# Altium PCB Copy of djb_v2_rigid_right_1.PcbDoc
Units mm, origin at the board's own origin, x right, y up, seen from the top; angles counter-clockwise.
Board outline 29 x 14.8 mm, 4 copper layers (Top Layer, Inner 1, Inner 2, Bottom Layer), stack 0.59 mm thick; 70 components, 44 nets, 286 pads, 92 vias.
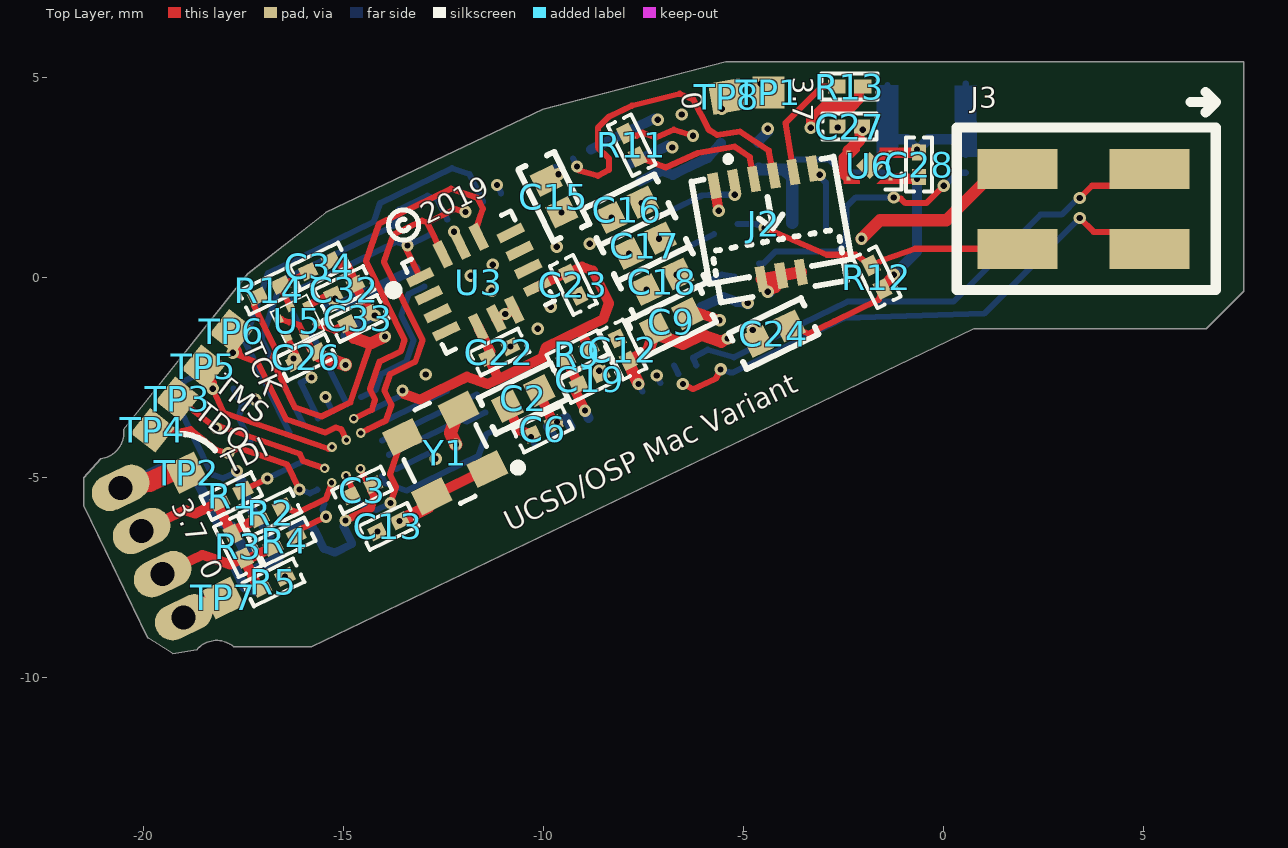
[diagram p0: Top Layer view]
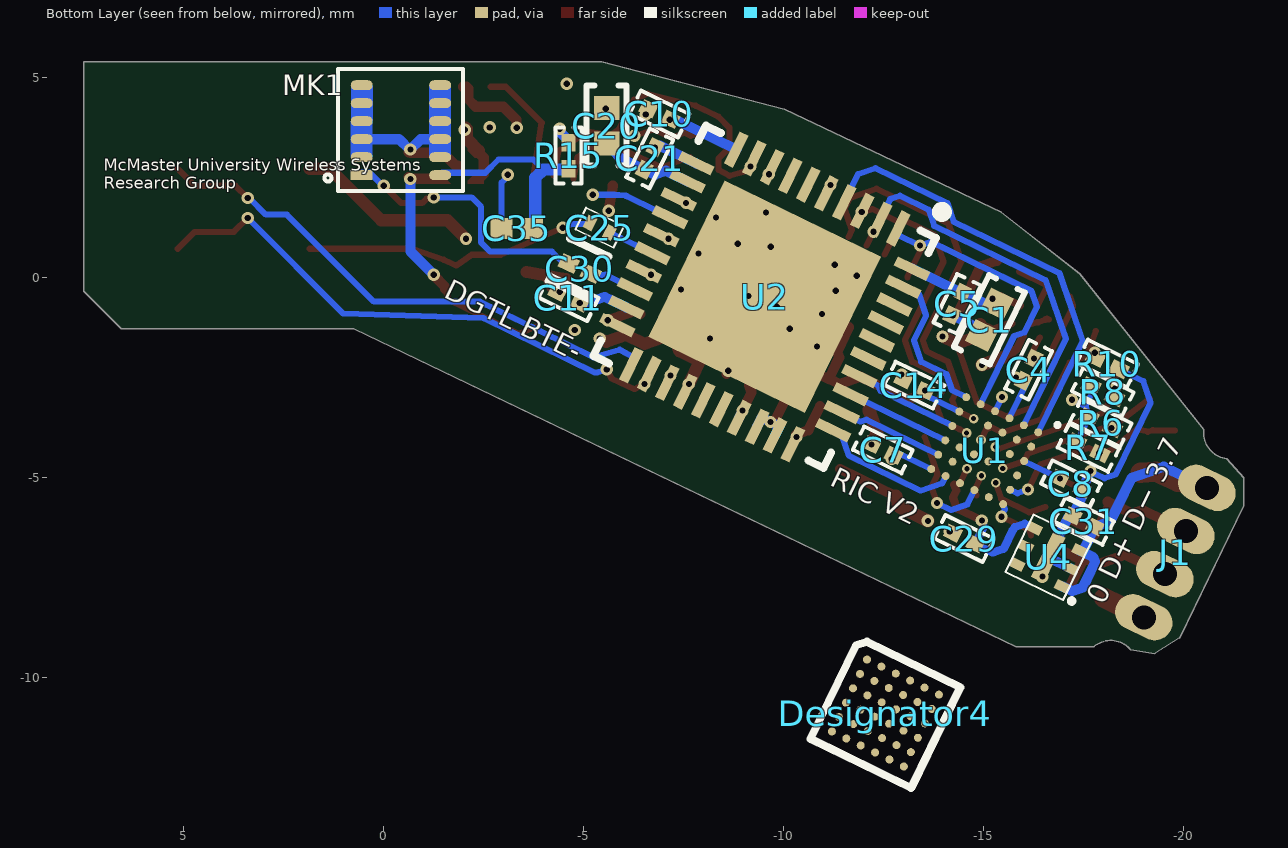
[diagram p1: Bottom Layer view, seen from below]
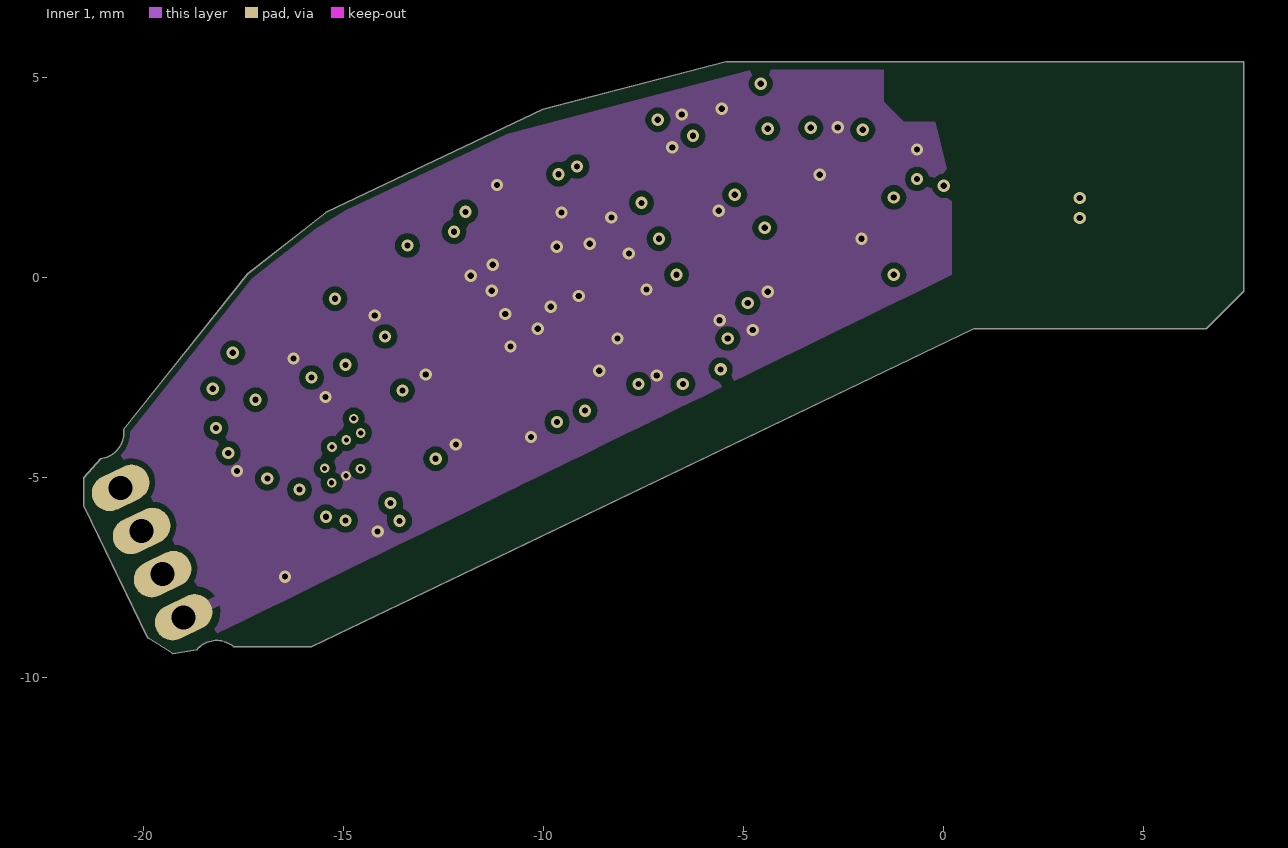
[diagram p2: Inner 1]
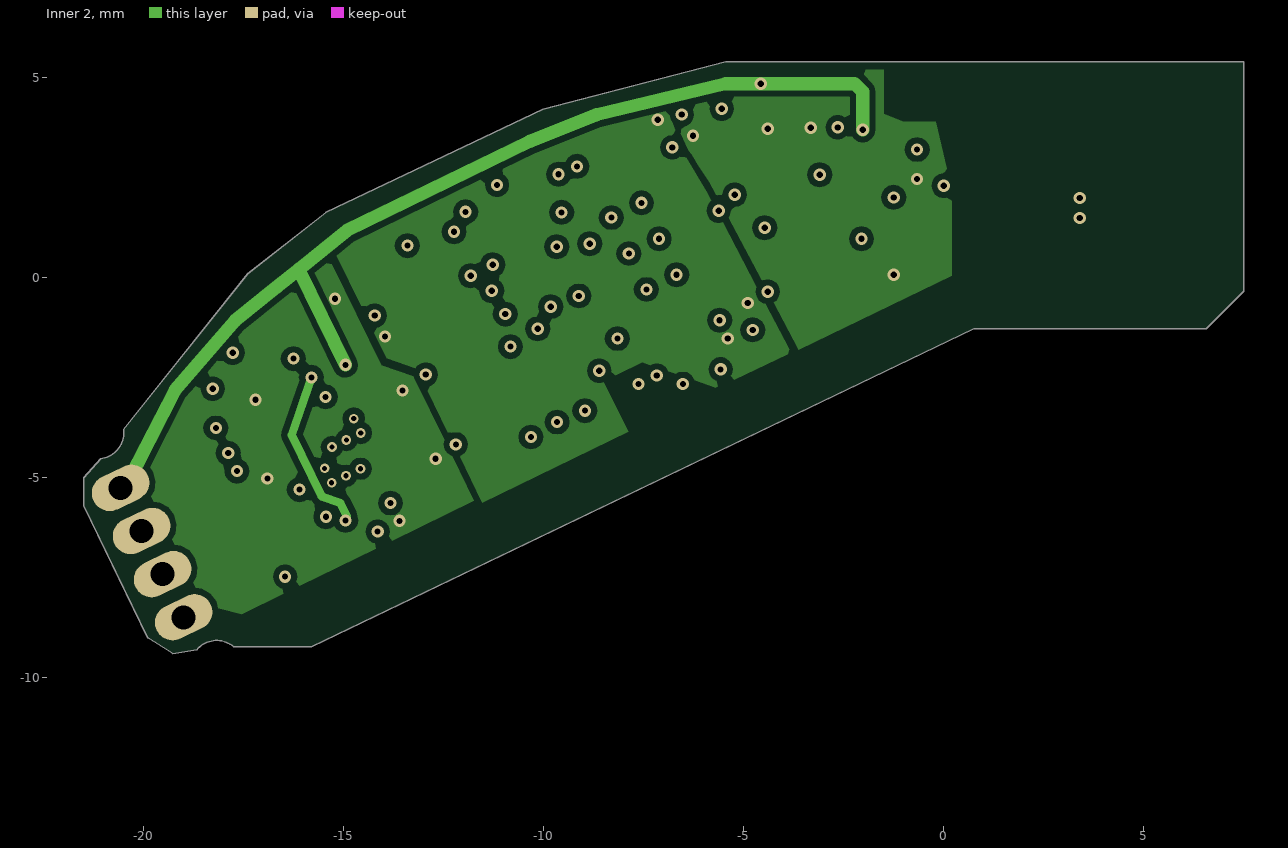
[diagram p3: Inner 2]

## Layer stack, top to bottom
Top Solder: solder mask 0.0102, Solder Resist, Dk 3.5
Top Layer: signal copper 0.0356
Dielectric 1: prepreg 0.0711, PP-006, Dk 4.1
Inner 1: signal copper 0.036
Dielectric 3: core 0.3048, Core-029, Dk 4.7
Inner 2: signal copper 0.036
Dielectric 2: prepreg 0.0711, PP-006, Dk 4.1
Bottom Layer: signal copper 0.0356
Bottom Solder: solder mask 0.0102, Solder Resist, Dk 3.5

## Board outline
-19.273,-9.396 -18.677,-9.304 cw(c-18.174,-9.723) -17.755,-9.221 -17.765,-9.225 -15.808,-9.225 0.75,-1.275 6.564,-1.275 7.5,-0.339 7.5,5.4 -5.447,5.4 -10.016,4.208 -15.444,1.633 -17.4,0.1 -20.503,-3.797 cw(c-21.153,-3.875) -21.075,-4.525 -21.5,-5 -21.5,-5.7 -19.898,-9.005 -19.885,-9.009

## Design rules (kind name [scope] priority, off if disabled: settings)
BoardOutlineClearance BoardOutlineClearance_Silk [OnLayer('Top Overlay') Or OnLayer('Bottom Overlay')] p1: gap=0 ignorepadtopadclearanceinfootprint=FALSE
BoardOutlineClearance BoardOutlineClearance_Normal [All] p2: gap=0.152 ignorepadtopadclearanceinfootprint=FALSE
Clearance [All] p1: gap=0.152 ignorepadtopadclearanceinfootprint=FALSE
ComponentClearance [All] p1: gap=0 collisioncheckmode=3 verticalgap=0 showdistances=FALSE
DiffPairsRouting [All] p1: maxlimit=0.254 minlimit=0.152 mostfreqgap=0.254 toplayer_minwidth=0.152 toplayer_maxwidth=0.381 toplayer_prefwidth=0.254 midlayer1_minwidth=0.152 midlayer1_maxwidth=0.381 midlayer1_prefwidth=0.254 midlayer2_minwidth=0.152 midlayer2_maxwidth=0.381 midlayer2_prefwidth=0.254 bottomlayer_minwidth=0.152 bottomlayer_maxwidth=0.381 bottomlayer_prefwidth=0.254 maxuncoupledlength=12.7
MinimumSolderMaskSliver [All] p1: minsoldermaskwidth=0.076
PasteMaskExpansion [All] p1 off: expansion=0
PlaneClearance [All] p1: clearance=0.254
PlaneConnect PlaneConnect_Via [IsVia] p1: planeconnectstyle=Direct reliefexpansion=0.254 reliefentries=4 reliefconductorwidth=0.254 reliefairgap=0.203
PlaneConnect PlaneConnect_Normal [All] p2: pad.planeconnectstyle=Relief pad.reliefexpansion=0.254 pad.reliefentries=4 pad.reliefconductorwidth=0.254 pad.reliefairgap=0.203 via.planeconnectstyle=Direct via.reliefexpansion=0.254 via.reliefentries=4 via.reliefconductorwidth=0.254 via.reliefairgap=0.203
PolygonConnect PolygonConnect_Normal [All] p1: thpad.connectstyle=Relief thpad.reliefconductorwidth=0.254 thpad.reliefentries=4 thpad.polygonreliefangle="90 Angle" thpad.airgapwidth=0.203 smdpad.connectstyle=Relief smdpad.reliefconductorwidth=0.254 smdpad.reliefentries=4 smdpad.polygonreliefangle="90 Angle" smdpad.airgapwidth=0.203 via.connectstyle=Direct via.reliefconductorwidth=0.254 via.reliefentries=4 via.polygonreliefangle="90 Angle" via.airgapwidth=0.254
RoutingVias [All] p1: holewidth=0.152 width=0.305 viastyle="Through Hole" minholewidth=0.127 minwidth=0.241 maxholewidth=1.27 maxwidth=2.54
SilkToSilkClearance [All] p1: silktosilkclearance=-25.4
SilkToSolderMaskClearance [IsPad] p1: minsilkscreentomaskgap=-25.4 clearancetoexposedcopper=TRUE
SolderMaskExpansion [All] p1 off: expansion=0.102 istentingtop=FALSE
Width [All] p1: maxlimit=2.54 minlimit=0.152 preferedwidth=0.152
22 further rules are at their usual default settings.

## Classes and differential pairs
differential pair LPRE: +LPRE_P -LPRE_N
differential pair LVDS: +LVDS_P -LVDS_N

## Components (designator, comment, footprint, x,y, rotation, side; value= is the part's Value field where it differs from the comment)
C1 "10uF" "CAP 0402/1005" -15.143,-1.049 r116 bottom
C2 "10uF" "CAP 0402/1005" -10.511,-3.018 r26 top
C3 "0.10uF" "CAP 0201/0603" -14.543,-5.313 r206 top
C4 "0.10uF" "CAP 0201/0603" -16.123,-2.301 r296 bottom
C5 "0.10uF" "CAP 0201/0603" -14.334,-0.655 r296 bottom
C6 "0.10uF" "CAP 0201/0603" -10.026,-3.783 r206 top
C7 "0.10uF" "CAP 0201/0603" -12.476,-4.305 r26 bottom
C8 "0.10uF" "CAP 0201/0603" -17.18,-5.153 r26 bottom
C9 "10uF" "CAP 0402/1005" -6.809,-1.096 r26 top
C10 "0.10uF" "CAP 0201/0603" -6.892,4.093 r206 bottom
C11 "0.10uF" "CAP 0201/0603" -4.619,-0.5 r206 bottom
C12 "0.10uF" "CAP 0201/0603" -8.023,-1.799 r296 top
C13 "0.10uF" "CAP 0201/0603" -13.881,-6.214 r26 top
C14 "0.10uF" "CAP 0201/0603" -13.265,-2.687 r26 bottom
C15 "10uF" "CAP 0402/1005" -9.745,2.028 r296 top
C16 "10uF" "CAP 0402/1005" -7.915,1.697 r206 top
C17 "10uF" "CAP 0402/1005" -7.477,0.798 r206 top
C18 "10uF" "CAP 0402/1005" -7.038,-0.101 r206 top
C19 "1uF" "CAP 0201/0603" -8.851,-2.543 r206 top
C20 "10uF" "CAP 0402/1005" -5.576,3.8 r90 bottom
C21 "0.10uF" "CAP 0201/0603" -6.65,2.981 r296 bottom
C22 "0.10uF" "CAP 0201/0603" -11.11,-1.858 r206 top
C23 "0.10uF" "CAP 0201/0603" -9.26,-0.177 r116 top
C24 "10uF" "CAP 0402/1005" -4.25,-1.4 r26 top
C25 "CL03A105KQ3CSNH" CL03A105KQ3CSNH -5.4,1.25 r206 bottom
C26 "1uF" "CAP 0201/0603" -15.941,-1.99 r26 top
C27 "1uF" "CAP 0201/0603" -2.35,3.78 r0 top
C28 "1uF" "CAP 0201/0603" -0.618,2.825 r270 top
C29 "1uF" "CAP 0201/0603" -14.51,-6.521 r206 bottom
C30 "GRM033R60J155ME14D" FP-GRM033-0_03-IPC_B -4.898,0.229 r25 bottom
C31 "1uF" "CAP 0201/0603" -17.502,-6.089 r206 bottom
C32 "1uF" "CAP 0201/0603" -14.985,-0.299 r206 top
C33 "1uF" "CAP 0201/0603" -14.635,-1.018 r206 top
C34 "1uF" "CAP 0201/0603" -15.606,0.288 r206 top
C35 "CL03A104KQ3NNNC" CAPC0603X33X15ML03T05 -3.325,1.231 r180 bottom
Designator4 "Comment" BGA36x6 -12.082,-9.546 r206 bottom
J1 "PIGTAIL" PIGTAIL -19.791,-6.871 r116 bottom
J2 "FFC" HIROSE_FH58M-7S-0.25SHW-99 -4.375,1.825 r190 top
J3 "M22-6550242R" M22-6550242R 3.5,1.724 r270 top
MK1 "VA1200AA" VA1200AA -1.41,2.563 r0 bottom
R1 "2k" "RES 0201/0603" -17.809,-5.46 r26 top
R2 "100" "RES 0201/0603" -16.829,-5.872 r26 top
R3 "115" "RES 0201/0603" -17.643,-6.713 r116 top
R4 "100" "RES 0201/0603" -16.479,-6.591 r26 top
R5 "2k" "RES 0201/0603" -16.757,-7.617 r206 top
R6 "4.7k" "RES 0201/0603" -17.925,-3.625 r26 bottom
R7 "4.7k" "RES 0201/0603" -17.618,-4.254 r26 bottom
R8 "4.7k" "RES 0201/0603" -17.975,-2.85 r26 bottom
R9 "1k" "RES 0201/0603" -9.158,-1.913 r206 top
R10 "2.2k" "RES 0201/0603" -18.089,-2.147 r26 bottom
R11 "1k" "RES 0201/0603" -7.8,3.314 r116 top
R12 "1k" "RES 0201/0603" -1.675,0.012 r296 top
R13 "1k" "RES 0201/0603" -2.35,4.775 r0 top
R14 "3k" "RES 0201/0603" -16.864,-0.326 r26 top
R15 "1k" "RES 0201/0603" -4.625,3.05 r270 bottom
TP1 "TP_SMD_DJB" TP_SMD_DJB#1 -4.375,4.625 r90 top
TP2 "TP_SMD_DJB" TP_SMD_DJB#1 -18.925,-4.875 r116 top
TP3 "TP_SMD_DJB" TP_SMD_DJB#2 -19.15,-3.025 r116 top
TP4 "TP_SMD_DJB" TP_SMD_DJB#2 -19.775,-3.816 r116 top
TP5 "TP_SMD_DJB" TP_SMD_DJB#2 -18.5,-2.225 r116 top
TP6 "TP_SMD_DJB" TP_SMD_DJB#2 -17.8,-1.336 r116 top
TP7 "TP_SMD_DJB" TP_SMD_DJB#1 -18.013,-8.007 r116 top
TP8 "TP_SMD_DJB" TP_SMD_DJB#3 -5.425,4.525 r90 top
U1 "LCMXO3LF-1300E-XUWG36" BGA36_WLCS_25X25_MACHXO3 -15.025,-4.324 r296 bottom
U2 "ADAU1372" QFN40_LFCSP_WQ_6mmx6mm -9.524,-0.479 r296 bottom
U3 "BMI160" LGA14R50P5X4_300X250X83 -11.629,-0.109 r26 top
U4 "MIC5367 LDO 1.2V" "LDO 1.2V" -16.617,-6.992 r116 bottom
U5 "MIC5380/1-xxYFT" "06L FCSTSLP" -16.156,-1.093 r206 top
U6 "MIC5504-1.8YMT" MICREL_DFN4 -1.85,2.8 r90 top
Y1 "12.288 MHz" OSC_2.5X2.0MM -11.407,-4.785 r116 top

## Footprints (in the part's own frame and the unit in brackets; to place one, negate y for a bottom-side part, rotate by r counter-clockwise, add the part's x,y. Pads: shape width x height; smd on the part's side, far side on the other; paste and mask are expansions set on the pad)
"06L FCSTSLP" [mm] "6-Pin 1mm x 1mm Thin MLF®   (FT)"
  oct 0.2x0.2 smd mask+0.01: 1(-0.4,0.25)
  rect 0.2x0.2 smd mask+0.01: 2(-0.4,-0.25) 3(0,-0.4) 4(0.4,-0.25) 5(0.4,0.25) 6(0,0.4)
  silkscreen extent -0.65,-0.5 0.5,0.5, body extent -0.5,-0.5 0.5,0.5, height 0.5
BGA36_WLCS_25X25_MACHXO3 [mm] "Lattice MachXO3 WLCSP36"
  round 0.2 smd: A1(-1,1) A2(-0.6,1) A3(-0.2,1) A4(0.2,1) A5(0.6,1) A6(1,1) B1(-1,0.6) B2(-0.6,0.6) B3(-0.2,0.6) B4(0.2,0.6) B5(0.6,0.6) B6(1,0.6) C1(-1,0.2) C2(-0.6,0.2) C3(-0.2,0.2) C4(0.2,0.2) C5(0.6,0.2) C6(1,0.2) D1(-1,-0.2) D2(-0.6,-0.2) D3(-0.2,-0.2) D4(0.2,-0.2) D5(0.6,-0.2) D6(1,-0.2) E1(-1,-0.6) E2(-0.6,-0.6) E3(-0.2,-0.6) E4(0.2,-0.6) E5(0.6,-0.6) E6(1,-0.6) F1(-1,-1) F2(-0.6,-1) F3(-0.2,-1) F4(0.2,-1) F5(0.6,-1) F6(1,-1)
  silkscreen extent -1.42,1.3 -1.33,1.4, body extent -1.27,-1.24 1.27,1.24, height 0.58
BGA36x6 [mm]
  round 0.2 smd mask+0.05: A1(0,0) A2(0.4,0) A3(0.8,0) A4(1.2,0) A5(1.6,0) A6(2,0) B1(0,-0.4) B2(0.4,-0.4) B3(0.8,-0.4) B4(1.2,-0.4) B5(1.6,-0.4) B6(2,-0.4) C1(0,-0.8) C2(0.4,-0.8) C3(0.8,-0.8) C4(1.2,-0.8) C5(1.6,-0.8) C6(2,-0.8) D1(0,-1.2) D2(0.4,-1.2) D3(0.8,-1.2) D4(1.2,-1.2) D5(1.6,-1.2) D6(2,-1.2) E1(0,-1.6) E2(0.4,-1.6) E3(0.8,-1.6) E4(1.2,-1.6) E5(1.6,-1.6) E6(2,-1.6) F1(0,-2) F2(0.4,-2) F3(0.8,-2) F4(1.2,-2) F5(1.6,-2) F6(2,-2)
  silkscreen extent -0.4,-2.4 2.4,0.4, body extent -0.25,-2.25 2.25,0.24, height 0.78
"CAP 0201/0603" [mm] "Chip Capacitor, 2-Leads, Body 0.60x0.30mm, IPC Medium Density"
  rect 0.4x0.35 smd: 1(-0.31,0) 2(0.31,0)
  silkscreen extent -0.68,-0.33 0.68,0.33, body extent -0.3,-0.15 0.3,0.15, height 0.3
"CAP 0402/1005" [mm] "Chip Capacitor, 2-Leads, Body 1.02x0.51mm, IPC Medium Density"
  rect 0.6x0.64 smd: 1(-0.44,0) 2(0.44,0)
  silkscreen extent -1,-0.5 1,0.5, body extent -0.5,-0.26 0.5,0.26, height 0.52
CAPC0603X33X15ML03T05 [mm] "Chip Capacitor, 2-Leads, Body 0.60x0.30mm, IPC Low Density"
  rect 0.56x0.52 smd: 1(-0.38,0) 2(0.38,0)
  body extent -0.32,-0.17 0.32,0.17, height 0.33
CL03A105KQ3CSNH [mm]
  rect 0.25x0.35 smd mask+0.05: 1(-0.275,0) 2(0.275,0)
  silkscreen extent -0.53,-0.3 0.52,0.3, body extent -0.3,-0.15 0.3,0.15, height 0.3
FP-GRM033-0_03-IPC_B [mm]
  rect 0.454x0.363 smd paste+0 mask+0: 1(-0.304,0) 2(0.304,0)
  silkscreen extent -0.53,-0.58 0.53,0.58, body extent -0.3,-0.15 0.3,0.15, height 0.33
HIROSE_FH58M-7S-0.25SHW-99 [mm] "Hirose FH58M-7S-0.25SHW(99) Top+Bottom Contacts 7-pin FFC Connector"
  rect 0.25x0.65 smd: 1(0.75,-0.7) 2(0.5,1.8) 3(0.25,-0.7) 4(0,1.8) 5(-0.25,-0.7) 6(-0.5,1.8) 7(-0.75,-0.7)
  rect 0.27x0.65 smd: S(-1.25,-0.7) S(1.25,-0.7)
  silkscreen extent -1.8,-1.32 1.8,2.2, body extent -1.75,-0.91 1.75,2.19, height 0.9
"LDO 1.2V" [mm] "6-Pin 1.6mmx1.6mm Thin MLF (MT)"
  rect 0.25x0.35 smd mask+0.01: 1(-0.5,-0.625) 2(0,-0.625) 3(0.5,-0.625) 4(0.5,0.625) 5(0,0.625) 6(-0.5,0.625)
  rect 1.26x0.35 smd mask+0.01: 7(0,0)
  silkscreen extent -0.8,-1.06 0.8,0.8, body extent -0.8,-0.8 0.8,0.8, height 0.8
LGA14R50P5X4_300X250X83 [mm]
  rect 0.675x0.25 smd: 1(-1.262,0.75) 2(-1.263,0.25) 3(-1.263,-0.25) 4(-1.262,-0.75) 8(1.262,-0.75) 9(1.262,-0.25) 10(1.263,0.25) 11(1.262,0.75)
  rect 0.25x0.675 smd: 5(-0.5,-1.013) 6(0,-1.013) 7(0.5,-1.013) 12(0.5,1.013) 13(0,1.013) 14(-0.5,1.012)
  silkscreen extent -2.1,-1.25 1.5,1.25, body extent -1.52,-1.27 1.52,1.27, height 0.83
M22-6550242R [mm] "4 Position Receptacle Connector 0.079\" (2.00mm) Surface Mount, Right Angle Gold"
  rect 1x2 smd: 1(-1,1.65) 2(1,1.65) 3(1,-1.65) 4(-1,-1.65)
  silkscreen extent -2.92,-3.18 2.03,3.3, body extent -2.15,-2.29 2.15,10.16, height 4.01
MICREL_DFN4 [mm] "Micrel DFN-4 from MIC5504-1.8YMT datasheet"
  rect 0.1x0.1 smd: 1(-0.325,-0.525) 2(0.325,-0.525) 3(0.325,0.525) 4(-0.325,0.525)
  rect 0.48x0.48 smd rot 45: EP(0,0)
  Top Layer region: -0.45,-0.18 -0.45,-0.65 -0.2,-0.65 -0.2,-0.43
  Top Layer region: 0.45,-0.65 0.2,-0.65 0.2,-0.43 0.38,-0.25 0.45,-0.25
  Top Layer region: -0.45,0.65 -0.2,0.65 -0.2,0.43 -0.38,0.25 -0.45,0.25
  Top Layer region: 0.45,0.65 0.2,0.65 0.2,0.43 0.38,0.25 0.45,0.25
  silkscreen extent -0.6,-0.8 -0.2,-0.4, body extent -0.5,-0.5 0.5,0.5, height 0.57
OSC_2.5X2.0MM [mm] "SMD MEMS oscillator, 2.5x2.0 mm"
  rect 0.65x0.85 smd: 1(0,0) 2(1.65,0) 3(1.65,1.55) 4(0,1.55)
  silkscreen extent -0.48,-0.8 2.13,1.77, body extent -0.48,-0.25 2.13,1.8, height 0.86
PIGTAIL [mm] "PIGTAIL"
  oval 0.9x1.5 hole 0.6: 1(1.8,0) 2(0.6,0) 3(-0.6,0) 4(-1.8,0)
QFN40_LFCSP_WQ_6mmx6mm [mm] "QFN, 40-Leads, Body 6.00x6.00mm, Pitch 0.50mm, Thermal Pad 4.35x4.35mm, IPC Medium Density"
  rect 0.9x0.25 smd: 1(-3,2.25) 2(-3,1.75) 3(-3,1.25) 4(-3,0.75) 5(-3,0.25) 6(-3,-0.25) 7(-3,-0.75) 8(-3,-1.25) 9(-3,-1.75) 10(-3,-2.25) 21(3,-2.25) 22(3,-1.75) 23(3,-1.25) 24(3,-0.75) 25(3,-0.25) 26(3,0.25) 27(3,0.75) 28(3,1.25) 29(3,1.75) 30(3,2.25)
  rect 0.25x0.9 smd: 11(-2.25,-3) 12(-1.75,-3) 13(-1.25,-3) 14(-0.75,-3) 15(-0.25,-3) 16(0.25,-3) 17(0.75,-3) 18(1.25,-3) 19(1.75,-3) 20(2.25,-3) 31(2.25,3) 32(1.75,3) 33(1.25,3) 34(0.75,3) 35(0.25,3) 36(-0.25,3) 37(-0.75,3) 38(-1.25,3) 39(-1.75,3) 40(-2.25,3)
  rect 4.35x4.35 smd: 41(0,0)
  silkscreen extent -3.97,-3.2 3.2,3.2, body extent -3.07,-3.07 3.07,3.07, height 0.8
"RES 0201/0603" [mm] "Chip Resistor, 2-Leads, Body 0.60x0.30mm, IPC Medium Density"
  rect 0.44x0.35 smd: 1(-0.325,0) 2(0.325,0)
  silkscreen extent -0.7,-0.33 0.7,0.33, body extent -0.3,-0.15 0.3,0.15, height 0.21
TP_SMD_DJB#1 [mm] "DJB style SMD test point"
  rect 0.8x0.8 smd paste-1000: 1(0,0)
TP_SMD_DJB#2 [mm] "DJB style SMD test point"
  rect 0.8x0.8 smd rot 116 paste-1000: 1(0,0)
TP_SMD_DJB#3 [mm] "DJB style SMD test point"
  rect 0.8x0.8 smd rot 100 paste-1000: 1(0,0)
VA1200AA [mm]
  rect 0.55x0.25 smd mask+0.07: 1(1.96,0)
  oval 0.55x0.25 smd mask+0.07: 2(1.96,-0.45) 3(1.96,-0.9) 4(1.96,-1.35) 5(1.96,-1.8) 6(1.96,-2.25) 7(0,-2.25) 8(0,-1.8) 9(0,-1.35) 10(0,-0.9) 11(0,-0.45) 12(0,0)
  silkscreen extent -0.58,-2.65 2.89,0.4, body extent 0.1,-2.5 1.95,0.25, height 0.93

## Part data
C1 C2 C9 C15 C16 C17 C18 C20 C24: library part C1005X5R0J106M050BC, "CAP CER 10UF 6.3V X5R 0402", Device Package="0402 (1005 Metric)", Manufacturer="TDK Corporation", Supplier Part Number 1=445-8920-2-ND, TemperatureCoefficient=X5R, TemperatureRange="-55C ~ 85C", Tolerance=20%, Voltage=6.3V, ComponentLink1Description=Datasheet, ComponentLink1URL=https://product.tdk.com/info/en/catalog/datasheets/mlcc_commercial_general_en.pdf, ComponentLink2Description="Digi-Key Listing", ComponentLink2URL=https://www.digikey.com/product-detail/en/tdk-corporation/C1005X5R0J106M050BC/445-8920-2-ND/3507809, PartId=12380, Part Number=C1005X5R0J106M050BC, Price=0.119, Supplier 1=Digi-Key
C3 C4 C5 C6 C7 C8 C10 C11 C12 C13 C14 C21 C22 C23: library part CL03A104KP3NNNC, "CAP CER 0.1UF 10V X5R 0201", Device Package="0201 (0603 Metric)", Manufacturer="Samsung Electro-Mechanics America, Inc.", Supplier Part Number 1=1276-1115-2-ND, TemperatureCoefficient=X5R, TemperatureRange="-55C ~ 85C", Tolerance=10%, Voltage=10V, ComponentLink1Description=Datasheet, ComponentLink1URL=http://www.samsungsem.com/kr/support/product-search/mlcc/__icsFiles/afieldfile/2016/08/18/S_CL03A104KP3NNND.pdf, ComponentLink2Description="Digi-Key Listing", ComponentLink2URL=https://www.digikey.com/product-detail/en/samsung-electro-mechanics-america-inc/CL03A104KP3NNNC/1276-1115-2-ND/3886773, PartId=20562, Part Number=CL03A104KP3NNNC, Price=0.0031, Supplier 1=Digi-Key
C19 C26 C27 C28 C29 C31 C32 C33 C34: library part 02016D105MAT2A, "CAP CER 1UF 6.3V X5R 0201", Device Package="0201 (0603 Metric)", Manufacturer="AVX Corporation", Supplier Part Number 1=478-7862-2-ND, TemperatureCoefficient=X5R, TemperatureRange="-55C ~ 85C", Tolerance=20%, Voltage=6.3V, ComponentLink1Description=Datasheet, ComponentLink1URL=http://datasheets.avx.com/cx5r.pdf, ComponentLink2Description="Digi-Key Listing", ComponentLink2URL=https://www.digikey.com/product-detail/en/avx-corporation/02016D105MAT2A/478-7862-2-ND/3079664, PartId=20442, Part Number=02016D105MAT2A, Price=0.063, Supplier 1=Digi-Key
C25: "1 µF ±10% 6.3V Ceramic Capacitor X5R 0201 (0603 Metric)", Supplier Part Number 1=1276-6440-1-ND, Supplier 1=Digi-Key
C30: library part CMP-06035-017352-1, "Chip Multilayer Ceramic Capacitors for General Purpose, 0201, 1.5uF, X5R, 15%, 20%, 6.3V", Capacitance=1.5uF, Case Code (Imperial)=0201, Case Code (Metric)=0603, Dielectric=X5R, Max Operating Temperature=85°C, Min Operating Temperature=-55°C, Tolerance=20%, Voltage Rating=6.3V, Case/Package=0201, Length=0.024inch, Mount="Surface Mount", Packaging="Tape and Reel", Thickness=0.013inch, Voltage Rating (DC)=6.3V, Width=0.012inch
C35: library part CMP-2010-00674-1, Manufacturer=Samsung, Part Number=CL03A104KQ3NNNC
J2: library part HIROSE_FH58M-7S-0.25SHW-99, "Hirose FH58M-7S-0.25SHW(99) 7-pin Top+Bottom Contact FFC Connector"
J3: "4 Position Receptacle Connector 0.079\" (2.00mm) Surface Mount, Right Angle Gold", Supplier Part Number 1=952-3188-1-ND, Supplier 1=Digi-Key
MK1: "Bone Conductor Sensor Accelerometer"
R1 R5: library part RC0201FR-072KL, "RES SMD 2K OHM 1% 1/20W 0201", Device Package="0201 (0603 Metric)", Manufacturer=Yageo, PowerRating="0.05W, 1/20W", Supplier Part Number 1=YAG2280TR-ND, TemperatureCoefficient=200ppm/C, TemperatureRange="-55C ~ 125C", Tolerance=1%, ComponentLink1Description=Datasheet, ComponentLink1URL=http://www.yageo.com/documents/recent/PYu-RC_Group_51_RoHS_L_04.pdf, ComponentLink2Description="Digi-Key Listing", ComponentLink2URL=https://www.digikey.com/product-detail/en/yageo/RC0201FR-072KL/YAG2280TR-ND/3202400, PartId=19505, Part Number=RC0201FR-072KL, Price=0.0042, Supplier 1=Digi-Key
R2 R4: library part RC0603F101CS, "RES SMD 100 OHM 1% 1/20W 0201", Device Package="0201 (0603 Metric)", Manufacturer="Samsung Electro-Mechanics America, Inc.", PowerRating="0.05W, 1/20W", Supplier Part Number 1=1276-3601-2-ND, TemperatureCoefficient=250ppm/C, TemperatureRange="-55C ~ 125C", Tolerance=1%, ComponentLink1Description=Datasheet, ComponentLink1URL=//media.digikey.com/pdf/Data%20Sheets/Samsung%20PDFs/RC_Series_ds.pdf, ComponentLink2Description="Digi-Key Listing", ComponentLink2URL=https://www.digikey.com/product-detail/en/samsung-electro-mechanics-america-inc/RC0603F101CS/1276-3601-2-ND/3963908, PartId=19787, Part Number=RC0603F101CS, Price=0.0081, Supplier 1=Digi-Key
R3: library part RC0201FR-07115RL, "RES SMD 115 OHM 1% 1/20W 0201", Device Package="0201 (0603 Metric)", Manufacturer=Yageo, PowerRating="0.05W, 1/20W", Supplier Part Number 1=YAG2383TR-ND, TemperatureCoefficient=200ppm/C, TemperatureRange="-55C ~ 125C", Tolerance=1%, ComponentLink1Description=Datasheet, ComponentLink1URL=http://www.yageo.com/documents/recent/PYu-RC_Group_51_RoHS_L_04.pdf, ComponentLink2Description="Digi-Key Listing", ComponentLink2URL=https://www.digikey.com/product-detail/en/yageo/RC0201FR-07115RL/YAG2383TR-ND/5280243, PartId=20289, Part Number=RC0201FR-07115RL, Price=0.0042, Supplier 1=Digi-Key
R6 R7 R8: library part RC0201FR-074K7L, "RES SMD 4.7K OHM 1% 1/20W 0201", Device Package="0201 (0603 Metric)", Manufacturer=Yageo, PowerRating="0.05W, 1/20W", Supplier Part Number 1=311-4.70KMTR-ND, TemperatureCoefficient=200ppm/C, TemperatureRange="-55C ~ 125C", Tolerance=1%, ComponentLink1Description=Datasheet, ComponentLink1URL=http://www.yageo.com/documents/recent/PYu-RC_Group_51_RoHS_L_04.pdf, ComponentLink2Description="Digi-Key Listing", ComponentLink2URL=https://www.digikey.com/product-detail/en/yageo/RC0201FR-074K7L/311-4.70KMTR-ND/1948894, PartId=19526, Part Number=RC0201FR-074K7L, Price=0.0056, Supplier 1=Digi-Key
R9 R11 R12 R13 R15: library part RC0201JR-071KL, "RES SMD 1K OHM 5% 1/20W 0201", Device Package="0201 (0603 Metric)", Manufacturer=Yageo, PowerRating="0.05W, 1/20W", Supplier Part Number 1=311-1KNTR-ND, TemperatureCoefficient=200ppm/C, TemperatureRange="-55C ~ 125C", Tolerance=5%, ComponentLink1Description=Datasheet, ComponentLink1URL=http://www.yageo.com/documents/recent/PYu-RC_Group_51_RoHS_L_04.pdf, ComponentLink2Description="Digi-Key Listing", ComponentLink2URL=https://www.digikey.com/product-detail/en/yageo/RC0201JR-071KL/311-1KNTR-ND/1948922, PartId=19463, Part Number=RC0201JR-071KL, Price=0.0042, Supplier 1=Digi-Key
R10: library part RC0603F222CS, "RES SMD 2.2K OHM 1% 1/20W 0201", Device Package="0201 (0603 Metric)", Manufacturer="Samsung Electro-Mechanics America, Inc.", PowerRating="0.05W, 1/20W", Supplier Part Number 1=1276-3634-2-ND, TemperatureCoefficient=250ppm/C, TemperatureRange="-55C ~ 125C", Tolerance=1%, ComponentLink1Description=Datasheet, ComponentLink1URL=//media.digikey.com/pdf/Data%20Sheets/Samsung%20PDFs/RC_Series_ds.pdf, ComponentLink2Description="Digi-Key Listing", ComponentLink2URL=https://www.digikey.com/product-detail/en/samsung-electro-mechanics-america-inc/RC0603F222CS/1276-3634-2-ND/3963941, PartId=19542, Part Number=RC0603F222CS, Price=0.0019, Supplier 1=Digi-Key
R14: library part RC0201FR-073KL, "RES SMD 3K OHM 1% 1/20W 0201", Device Package="0201 (0603 Metric)", Manufacturer=Yageo, PowerRating="0.05W, 1/20W", Supplier Part Number 1=YAG2656TR-ND, TemperatureCoefficient=200ppm/C, TemperatureRange="-55C ~ 125C", Tolerance=1%, ComponentLink1Description=Datasheet, ComponentLink1URL=http://www.yageo.com/documents/recent/PYu-RC_Group_51_RoHS_L_04.pdf, ComponentLink2Description="Digi-Key Listing", ComponentLink2URL=https://www.digikey.com/product-detail/en/yageo/RC0201FR-073KL/YAG2656TR-ND/5280516, PartId=19520, Part Number=RC0201FR-073KL, Price=0.0042, Supplier 1=Digi-Key
TP1 TP2 TP3 TP4 TP5 TP6 TP7 TP8: "Digital Jellybean Style SMD Test Point", DNP=DNP
U1: "Lattice MachXO3 36-ball 2.5x2.5mm FPGA"
U2: library part ADAU1772BCPZ, "General Purpose Audio Codec 4ADC / 2DAC Ch 40-Pin LFCSP"
U3: library part BMI160_1, "BMI160 2.5 x 3 mm Tiaxial Accelerometer / Gyroscope Inertial Measurement Unit", Package="LGA-14 Bosch", Availability=Good, MF=Bosch, MP=BMI160, Price="3.29 USD"
U4: Supplier Part Number 1=576-3723-6-ND, Supplier 1=Digi-Key
U5: "LDO 2fixed Outputs", Supplier Part Number 1=576-3453-6-ND, Supplier 1=Digi-Key
U6: library part MICREL_MIC5504-1.8YMT, "Micrel MIC5504-1.8YMT 1.8V 300mA LDO"
Y1: library part MC_DSC1033DI2-012.2880, "Microchip 12.288 MHz SMD MEMS Oscillator", DIGIKEY_PN=DSC1033DI2-012.2880-ND

## Via types
v1: diameter 0.305, hole 0.152, Top Layer to Bottom Layer, tented both sides, 79 vias
v2: diameter 0.241, hole 0.127, Top Layer to Bottom Layer, tented both sides, 8 vias
v3: diameter 0.305, hole 0.152, Top Layer to Bottom Layer, 5 vias

## Nets (pads, with @x,y where several pads share a name; then routed paths per layer and width w, separated by ;. In a path a pad name is that pad's centre, name@x,y a point inside that pad or via, vN(x,y) a via of type N, cw(c..) or ccw(c..) an arc to the next point about the centre after c; other vN are vias at no path point)
+1V2_D: C3.1 C4.2 C29.2 U1.C1 U1.D5 U4.4 | length 9.9
  Top Layer w0.152: v2(-14.582,-4.776) -14.411,-5.126 C3.1
  Top Layer w0.203: v1(-14.953,-6.069) -14.324,-5.762 -14.232,-5.495 -14.315,-5.324 C3.1
  Inner 2 w0.203: v1(-15.808,-2.492) -16.302,-3.929 -15.551,-5.471 -15.083,-5.632 -14.918,-5.969 v1(-14.953,-6.069)
  Bottom Layer w0.152: C4.2@-16.077,-2.623 U1.C1 ; C4.2 v1(-15.808,-2.492)
  Bottom Layer w0.203: U4.4 -16.027,-6.148 -15.768,-6.237 -15.735,-6.304 -15.727,-6.307 -15.496,-6.779 -15.229,-6.871 C29.2 -15.003,-6.216 v1(-14.953,-6.069)
+1V8: C24.2 C28.2 R11.2 R12.2 R13.2 R15.1 U6.1 | length 10.9
  Top Layer w0.152: R11.2 -7.675,3.55 -7.525,3.625 -7.204,3.5 -6.75,3.7 v1(-6.271,3.55) ; C24.2 -3.375,-1.4 -2.733,-1.088 -1.625,-0.55 R12.2
  Top Layer w0.254: v1(-3.325,3.75) -3.315,3.76 -3.315,3.95 -2.99,4.275 -2.3,4.275 -2.118,4.457 -2.118,4.727 -2.07,4.775 R13.2 R13.2@-1.98,4.775 ; R12.2 -1.533,-0.222 -1.25,0.061 v3(-1.25,0.075) ; U6.1 C28.2@-0.658,2.475 ; v1(-0.665,2.467) C28.2@-0.658,2.475 ; C28.2 C28.2@-0.658,2.475
  Bottom Layer w0.254: R15.1 -4.65,3.4 -4.4,3.65 v1(-4.4,3.725) ; v3(-1.25,0.075) -0.665,0.659 v1(-0.665,2.467)
+3V3_A: C9.1 C10.2 C11.2 C12.2 C33.2 R14.1 U2.10 U2.19 U2.24 U5.1 | length 15.4
  Top Layer w0.152: R14.1 -17.237,-0.702 -16.7,-1.803 -16.792,-2.071 -16.222,-3.239 -15.553,-3.469 -14.834,-3.119 -14.328,-1.648
  Top Layer w0.203: U5.1 -15.219,-1.303 C33.2
  Top Layer w0.305: C33.2 -14.742,-1.505 -14.328,-1.648 v1(-13.968,-1.472) ; v1(-7.627,-2.657) -7.897,-2.105 C12.2 -7.393,-1.837 C9.1 ; C9.1@-7.134,-1.432 C9.1 ; v1(-5.4,-1.52) -5.561,-1.6 -6.063,-1.427 -6.523,-1.651 -7.129,-1.442 C9.1
  Bottom Layer w0.152: v1(-7.627,-2.657) U2.24
  Bottom Layer w0.254: U2.10 -7.23,3.978 C10.2 ; U2.19 -5.525,-0.479 -5.175,-0.6 v1(-4.9,-0.633)
  Bottom Layer w0.305: v1(-4.9,-0.633) C11.2
  other v1: -7.15,3.95
+3V3_D: C1.2 C5.1 C7.1 C8.2 C13.2 C14.1 C22.2 C23.2 C32.2 R1.2 R6.2 R7.2 R8.2 R9.1 U1.A3 U1.F2 U1.F6 U2.40 U3.5 U3.8 U5.2 Y1.1 Y1.4 | length 22.5
  Top Layer w0.152: R1.2 v1(-16.91,-5.021)
  Top Layer w0.203: U5.2 -15.421,-0.456 -15.287,-0.502 v1(-15.22,-0.525)
  Top Layer w0.254: v1(-13.534,-2.818) -13.49,-2.908 -13.089,-3.046 -11.921,-2.476 -11.399,-2.656 -11.13,-2.524 ; Y1.4 Y1.1 ; U3.5 -11.338,-1.847 C22.2 -11.13,-2.524 ; U3.8 -9.449,0.12 C23.2 -9.045,0.273 -8.764,0.176 -8.37,-0.633 -8.508,-1.034 -9.047,-1.297 ; R9.1 -9.068,-1.357 -9.047,-1.297 ; -11.13,-2.524 -11.116,-2.529 -10.038,-2.003 -9.946,-1.736 -9.047,-1.297
  Top Layer w0.33: v1(-13.602,-6.078) -12.892,-5.732 Y1.4
  Bottom Layer w0.152: R8.2@-17.76,-2.765 -17.541,-3.215 ; R7.2@-17.333,-4.131 R7.2 R6.2 -17.541,-3.215 ; v1(-17.204,-3.05) -17.541,-3.215 ; C8.2 U1.A3 ; U1.F2 -13.499,-2.913 -13.495,-2.899 v1(-13.534,-2.818) ; U1.F6 -12.798,-4.351 -12.785,-4.355 -12.745,-4.436 v1(-12.701,-4.526)
  Bottom Layer w0.254: v1(-15.22,-0.525) -15.364,-0.595 -15.422,-0.624 C1.2 -15.272,-0.676 -15.162,-0.714 -15.135,-0.701 C5.1 -14.456,-0.381 U2.40
+3V7: C26.2 C27.2 C31.2 J1.1 TP1.1 TP2.1 U4.1 U4.3 U5.4 U5.6 U6.3 U6.4 | length 37.8
  Top Layer w0.152: U5.4 -16.58,-1.022 -16.552,-1.032 -16.541,-1.052 -16.362,-1.114 -16.341,-1.104 -16.112,-1.183 U5.6
  Top Layer w0.203: U5.6 -15.81,-1.803 C26.2
  Top Layer w0.254: U6.4 -2.5,2.6 -2.5,3 U6.3 -2.375,3.175 ; -2.108,3.442 -2.108,3.732 -2.06,3.78 C27.2
  Top Layer w0.305: -2.375,3.175 -2.108,3.442
  Top Layer w0.33: C26.2 -15.614,-1.952 v1(-14.959,-2.178)
  Top Layer w0.508: J1.1 -19.85,-5.1 -19.3,-4.85 TP2.1
  Inner 2 w0.33: J1.1@-20.491,-5.299 -19.214,-2.807 -17.721,-1.077 -16.683,-0.241 -16.104,0.226 ; v1(-14.959,-2.178) -16.116,0.193 -16.104,0.226 ; v1(-2.025,3.7) -2.025,4.648 -2.227,4.85 -5.457,4.85 -8.684,4.075 -10.342,3.412 -14.926,1.176 -16.104,0.226
  Bottom Layer w0.254: J1.1@-20.668,-5.074 J1.1@-20.601,-5.097 ; J1.1 -19.501,-4.727 -18.692,-5.006 -18.162,-6.093 C31.2 -17.511,-6.777 U4.3 -17.735,-6.981 -17.781,-7.115 -17.474,-7.744 -17.206,-7.836 U4.1
  other v1: -4.575,4.85
BCLK: U1.F5 U2.32 | length 2.7
  Bottom Layer w0.152: U1.F5 -12.066,-3.548 -11.925,-3.597 U2.32
CCLK: U1.F1 U2.39 | length 3.8
  Bottom Layer w0.152: U1.F1 -14.205,-2.812 -14.067,-2.411 -13.438,-2.104 -13.254,-1.569 -13.56,-0.94 -13.379,-0.412 U2.39
CS_C: U1.A1 U2.4 | length 11
  Bottom Layer w0.152: U1.A1 -17.476,-1.581 -16.892,0.114 -14.25,1.402 -14.091,1.863 -12.296,2.738 -11.853,2.586 U2.4
CS_I: U1.E2 U3.12 | length 9.6
  Top Layer w0.152: v2(-14.749,-3.522) -14.299,-3.303 -14.214,-3.056 -14.346,-2.786 -14.109,-2.097 -13.569,-1.834 -13.477,-1.567 -14.442,0.411 -14.119,1.347 -12.322,2.224 -11.653,1.993 -11.522,1.724 -11.706,1.189 U3.12
DMIC: U1.F3 U2.34 | length 2.7
  Bottom Layer w0.152: U1.F3 -12.416,-2.829 -12.373,-2.702 U2.34
DSPK: U1.F4 U2.33 | length 2.6
  Bottom Layer w0.152: U1.F4 -14.032,-4.068 U2.33
GND: C1.1 C2.1 C3.2 C4.1 C5.2 C6.2 C7.2 C8.1 C9.2 C10.1 C11.1 C12.1 C13.1 C14.2 C15.2 C16.2 C17.2 C18.2 C19.1 C20.2 C21.1 C22.1 C23.1 C24.1 C26.1 C27.1 C28.1 C29.1 C31.1 C32.1 C33.1 C34.1 C35.1 J1.4 J2.2 J2.4 J2.6 J2.S J3.4 MK1.2 MK1.3 MK1.4 MK1.5 MK1.6 MK1.7 MK1.8 MK1.9 MK1.10 MK1.11 R5.1 R10.1 TP7.1 TP8.1 U1.C5 U1.D1 U2.5 U2.11 U2.20 U2.23 U2.30 U2.41 U3.6 U3.7 U4.2 U4.7 U5.5 U6.2 U6.EP Y1.2 | length 33.5
  Top Layer w0.152: U5.5 -16.167,-1.961 C26.1 ; v2(-14.942,-4.951) -14.771,-5.302 C3.2
  Top Layer w0.254: C34.1 -14.926,0.286 -14.707,-0.164 C33.1 ; U3.6 v1(-10.961,-0.909) U3.7 ; C2.1 -10.612,-3.813 C6.2 ; v1(-8.612,-2.326) C19.1 ; C9.2 -6.27,-0.833 v1(-5.601,-1.063) ; J2.S@-5.728,2.297 v1(-5.625,1.675) ; -4.309,0.009 -4.334,-0.091 v1(-4.4,-0.35) -4.398,-0.349 -4.2,-0.25 J2.4 ; C27.1 -2.66,3.77 v1(-2.65,3.76) ; U6.EP -1.8,2.8 -1.475,3.125 ; -1.425,3.125 U6.2 C28.1@-0.666,3.125 ; C28.1@-0.665,3.125 C28.1@-0.665,3.135 ; v1(-0.665,3.204) -0.665,3.183 C28.1
  Top Layer w0.305: J2.2 -4.309,0.009 J2.4 J2.6 ; v1(-2.055,0.973) -1.591,1.437 0.064,1.437 1.35,2.724 J3.4
  Top Layer w0.33: v1(-12.197,-4.169) -12.333,-3.89 Y1.2
  Top Layer w0.508: J1.4 TP7.1
  Bottom Layer w0.152: R10.1 -18.988,-2.586 -19.172,-3.12 -18.296,-4.918 -18.015,-5.015 v1@-17.673,-4.848 ; v1(-15.459,-2.978) U1.D1 ; v1(-11.167,2.319) U2.5 ; v1(-10.319,-3.982) U2.30 ; v1(-7.173,-2.447) U2.23 ; U2.20 -5.839,-1.179 v1(-5.601,-1.063) ; v1(-3.1,2.575) -3.1,2.534 -2.945,2.379 C35.1 ; MK1.11@-1.41,3.075 MK1.7 ; v1(-0.665,3.204) v1@-0.643,3.204 ; MK1.2@0.55,3.075 MK1.3 MK1.4 MK1.5@0.55,4.425 ; MK1.5 MK1.6@0.55,4.858
  Bottom Layer w0.254: v1@-17.673,-4.848 C8.1 -17.495,-5.396 C31.1 -17.103,-5.994 U4.7 U4.2 ; C1.1 -14.89,-1.271 v1(-14.225,-0.947) ; U2.41@-8.625,-2.321 v1(-8.612,-2.326) ; U2.11 C21.1@-6.906,3.301 ; v1(-4.4,-0.35) -4.354,-0.35 C11.1 ; MK1.10 -0.924,3.463 v1(-0.665,3.204) ; v1@-0.643,3.204 -0.385,3.463 MK1.3
  other v1: -16.465,-7.474 -14.15,-6.345 -17.669,-4.835 -12.949,-2.422 -16.259,-2.022 -10.831,-1.722 -8.159,-1.521 -4.775,-1.303 -10.15,-1.275 -9.825,-0.725 -9.124,-0.456 -11.3,-0.325 -7.434,-0.294 -11.825,0.05 -11.275,0.325 -7.872,0.605 -9.675,0.775 -8.85,0.85 -8.31,1.504 -9.552,1.633 -6.786,3.26 -6.55,4.08 -5.55,4.225
LPRE_N: R2.2 U1.B5 | length 1.6
  Top Layer w0.152: R2.2 -16.136,-5.867 -15.439,-5.528 v2(-15.301,-5.126)
LPRE_P: R4.2 U1.A6 | length 1.3
  Top Layer w0.152: R4.2 -16.14,-6.315 v1(-15.444,-5.975)
  Bottom Layer w0.152: U1.A6 -15.531,-5.795 v1(-15.444,-5.975)
LRCLK: U1.E6 U2.31 | length 3.6
  Bottom Layer w0.152: U1.E6 -13.96,-5.14 -13.425,-5.324 -11.627,-4.447 -11.445,-3.919 U2.31
LVDS_N: J1.2 R1.1 R2.1 R3.2 | length 3.9
  Top Layer w0.254: J1.2 -18.975,-5.806 -18.708,-5.898 R1.1 -18.136,-5.702 R3.2 -17.75,-6.321 R2.1
LVDS_P: J1.3 R3.1 R4.1 R5.2 | length 3.9
  Top Layer w0.254: J1.3 -18.539,-6.928 -17.837,-7.17 R3.1 ; R5.2 -17.149,-7.725 R3.1 ; R4.1 -17.4,-7.04 R3.1
MIC1: J2.5 U2.9 | length 8.1
  Top Layer w0.152: v1(-9.168,2.783) -9.12,2.684 -8.644,2.55 -8.372,2.696 -8.372,2.982 -8.644,3.254 -8.644,3.751 -8.37,4.025 -7.8,4.3 -6.6,4.6 -6.259,4.454 -5.875,3.7 -5.663,3.57 -5.095,3.659 -4.375,3.18 J2.5
  Bottom Layer w0.152: U2.9 v1(-9.168,2.783)
MIC2: J2.1 U2.14 | length 2.1
  Bottom Layer w0.152: U2.14 -6.823,1.679 -6.086,2.038 cw(c-6.019,1.901) -6.032,2.053 -5.764,2.075 v1(-5.225,2.075)
MIC3: C25.2 U2.16 | length 1.1
  Bottom Layer w0.152: U2.16 C25.2@-5.738,1.09
MIC4: C30.1 U2.18 | length 1.1
  Bottom Layer w0.152: U2.18 -5.55,0.075 C30.1@-5.229,0.026
MISO: U1.E1 U2.1 U3.1 | length 7.9
  Top Layer w0.152: v1(-13.409,0.803) -13.438,0.72 U3.1
  Bottom Layer w0.152: U1.E1 -15.757,-1.455 -16.024,-1.363 -16.331,-0.733 -16.193,-0.332 -13.677,0.895 v1(-13.409,0.803) U2.1@-12.87,1.066
MOSI: U1.E3 U2.3 U3.14 | length 9.1
  Top Layer w0.152: v2(-14.573,-3.881) -14.394,-3.794 -14.392,-3.789 -13.943,-3.57 -13.806,-3.173 -13.981,-2.814 -13.843,-2.413 -13.214,-2.106 -13.03,-1.571 -13.994,0.406 -13.764,1.075 -13.045,1.426 -12.911,1.38 ; U3.14 -12.911,1.38 ; v1(-11.952,1.647) -11.925,1.638 -11.943,1.629 -11.956,1.634 -12.21,1.722 -12.911,1.38
  Bottom Layer w0.152: U2.3 v1(-11.952,1.647)
NetC2_2: C2.2 C6.1 U2.28 U2.29 | length 1.9
  Top Layer w0.254: C2.2 -10.129,-2.865 C6.1
  Bottom Layer w0.254: U2.29 -9.891,-3.717 v1(-9.667,-3.608) -9.442,-3.498 U2.28
NetC15_1: C15.1 U2.8 | length 0.3
  Top Layer w0.152: C15.1@-9.651,2.519 v1(-9.628,2.586)
  Bottom Layer w0.152: U2.8 v1(-9.628,2.586)
NetC16_1: C16.1 U2.13 | length 0
  Top Layer w0.152: v1(-7.555,1.872) C16.1
NetC17_1: C17.1 U2.15 | length 0
  Top Layer w0.152: v1(-7.117,0.973) C17.1
NetC18_1: C18.1 U2.17 | length 0
  Top Layer w0.152: v1(-6.679,0.075) C18.1
NetC19_2: C19.2 R9.2 U2.27 | length 1.6
  Top Layer w0.254: R9.2 -9.43,-2.063 C19.2 -9.194,-2.866 v1(-8.971,-3.324)
  Bottom Layer w0.254: v1(-8.971,-3.324) U2.27
NetC20_1: C20.1 C21.2 U2.12 | length 2.4
  Bottom Layer w0.254: U2.12 -7.056,2.672 -6.775,2.576 C21.2 -5.9,3 C20.1
NetC25_1: C25.1 J3.3 R12.1 | length 7.3
  Top Layer w0.152: v1(-4.475,1.25) -2.925,0.575 -2.2,0.575 R12.1 -1.5,0.45 -0.714,0.724 J3.3
  Bottom Layer w0.152: C25.1@-5.151,1.348 -4.705,1.348 -4.705,1.342 v1(-4.475,1.25)
NetC30_2: C30.2 MK1.1 | length 6.7
  Top Layer w0.152: v3(-1.25,2.009) -1.221,1.979 -1.075,1.979 -0.959,1.864 -0.436,1.864 v3(0,2.3)
  Bottom Layer w0.152: C30.2 -4.504,0.357 -4.207,0.655 -2.658,0.655 -2.436,0.877 -2.436,1.769 -2.197,2.009 v3(-1.25,2.009) ; v3(0,2.3) 0.025,2.3 MK1.1@0.35,2.625 ; MK1.1@0.4,2.625 MK1.1@0.55,2.625
NetC34_2: C34.2 R14.2 U5.3 | length 1.4
  Top Layer w0.152: U5.3 -16.583,-0.217 R14.2 C34.2
NetC35_2: C35.2 MK1.12 R15.2 | length 4.8
  Bottom Layer w0.152: -3.993,2.704 -3.741,2.956 -2.87,2.956 -2.539,2.625 MK1.12@-1.46,2.625
  Bottom Layer w0.305: R15.2 -4.604,2.704 -3.993,2.704 -3.789,2.5 C35.2@-3.789,1.369
NetJ2_3: J2.3 R11.1 | length 3.6
  Top Layer w0.152: R11.1 -6.95,2.755 -6.15,3.117 -5.225,3.275 -4.85,3.022 J2.3
NetJ2_7: J2.7 R13.1 | length 2.9
  Top Layer w0.152: J2.7 -3.95,3.875 -3.05,4.775 R13.1
OSC: U1.C6 Y1.3 | length 3
  Top Layer w0.152: v1(-13.83,-5.633) -13.692,-5.232 -13.846,-4.917 Y1.3
  Bottom Layer w0.152: U1.C6 -14.591,-5.67 -14.19,-5.808 v1(-13.83,-5.633)
RCVN: J3.1 U2.21 | length 13.4
  Top Layer w0.152: v3(3.4,1.993) 3.707,2.3 4.726,2.3 J3.1
  Bottom Layer w0.152: U2.21 -6.267,-2 -5.9,-1.8 -5.245,-1.987 -3.9,-1.326 -2.404,-0.595 0.245,-0.595 2.419,1.579 2.947,1.579 3.361,1.993 v3(3.4,1.993)
RCVP: J3.2 U2.22 | length 13.8
  Top Layer w0.152: v1(-6.523,-2.656) -6.27,-2.786 -5.7,-2.524 v1(-5.576,-2.29) ; v3(3.4,1.493) 3.746,1.147 4.726,1.147 J3.2
  Bottom Layer w0.152: U2.22@-6.739,-2.197 U2.22 ; v1(-5.576,-2.29) -5.366,-2.362 -5.342,-2.37 -5.281,-2.37 -2.511,-1.018 -2.482,-1.004 1.011,-0.895 v3(3.4,1.493)
SCLK: U1.B1 U2.2 U3.13 | length 9.5
  Top Layer w0.152: v1(-12.243,1.149) U3.13
  Bottom Layer w0.152: U1.B1 -17.055,-1.531 -16.548,-0.06 -13.762,1.299 -13.624,1.7 -12.905,2.05 -12.664,1.968 U2.2
TCK: R10.2 TP6.1 U1.D3 | length 4.7
  Top Layer w0.152: TP6.1 -17.624,-1.82 -17.575,-1.955 ; v1(-17.775,-1.875) -17.575,-1.955 ; v2(-14.933,-4.057) -15.064,-3.787 -15.198,-3.741 -15.468,-3.873 -16.437,-3.539 -17.149,-2.125 -17.575,-1.955
TDI: R7.1 TP4.1 U1.A5 | length 4.9
  Top Layer w0.152: TP4.1 -19.225,-3.813 -19.1,-3.85 -18.825,-3.787 -18.195,-4.3 v1(-17.888,-4.385) -17.618,-4.254 -16.415,-4.668 v1(-16.108,-5.297)
  Bottom Layer w0.152: R7.1 v1(-17.888,-4.385) ; v1(-16.108,-5.297) -15.841,-5.389 U1.A5
TDO: R6.1 TP3.1 U1.B4 | length 4.2
  Top Layer w0.152: TP3.1 v1(-18.195,-3.756) -18.105,-3.712 -16.099,-4.403 -16.011,-4.583 v2(-15.477,-4.767)
  Bottom Layer w0.152: R6.1 v1(-18.195,-3.756)
TMS: R8.1 TP5.1 U1.C3 | length 3.8
  Top Layer w0.152: TP5.1@-18.3,-2.524 -18.24,-2.618 v1(-18.275,-2.775) -18,-3.375 -15.382,-4.276 v2(-15.292,-4.232)
pads on no net: Designator4.A1 Designator4.A2 Designator4.A3 Designator4.A4 Designator4.A5 Designator4.A6 Designator4.B1 Designator4.B2 Designator4.B3 Designator4.B4 Designator4.B5 Designator4.B6 Designator4.C1 Designator4.C2 Designator4.C3 Designator4.C4 Designator4.C5 Designator4.C6 Designator4.D1 Designator4.D2 Designator4.D3 Designator4.D4 Designator4.D5 Designator4.D6 Designator4.E1 Designator4.E2 Designator4.E3 Designator4.E4 Designator4.E5 Designator4.E6 Designator4.F1 Designator4.F2 Designator4.F3 Designator4.F4 Designator4.F5 Designator4.F6 U1.A2 U1.A4 U1.B2 U1.B3 U1.B6 U1.C2 U1.C4 U1.D2 U1.D4 U1.D6 U1.E4 U1.E5 U2.6 U2.7 U2.25 U2.26 U2.35 U2.36 U2.37 U2.38 U3.2 U3.3 U3.4 U3.9 U3.10 U3.11 U4.5 U4.6

## Polygon pours and split planes (outlines as drawn)
+3V3_A on Inner 2 "+3V3_A_L03_P002" (solid, pour order 2): -15.519,1.252 -14.516,1.932 -11.91,3.203 -8.565,4.445 -7.119,4.8 -6.5,3.1 -5.9,2.1 -3.808,-1.887 -2.4,-1.186 -5.662,-2.762 -7.534,-2.117 -8.505,-2.591 -7.891,-3.849 -11.533,-5.625 -13.169,-2.271 -13.929,-2.009
+3V3_D on Inner 2 "+3V3_D_L03_P004" (solid, pour order 4): -15.694,1.154 -17.2,0.3 -21.2,-4.8 -19.715,-7.837 -17.312,-8.476 -11.684,-5.699 -13.262,-2.463 -14.065,-2.187
+1V8 on Inner 2 "Inner 2-+1V8" (solid, pour order 6): -1.5,5.2 -1.5,4.1 -1,3.9 -0.2,3.9 0.2,2.2 0.2,0.05 -3.622,-1.796 -5.863,2.4 -6.392,3.202 -7.09,4.807 -5.4,5.2
GND on Inner 1 "GND_L02_P000" (solid, pour order 0): 0.2,0.069 0.2,2.2 -0.215,3.9 -1,3.9 -1.5,4.4 -1.5,5.2 -5.44,5.2 -8.8,4.4 -12.001,3.202 -14.6,1.9 -17.2,0.3 -21.2,-4.8 -19,-9.3

## Other copper
Bottom Layer:
  region net GND: 0.279,3.011 0.83,3.014 0.821,4.814 0.27,4.811
  rectangle net GND: -1.685,3.013 -1.135,4.812

## Silkscreen, mask and mechanical layers (free items; w line width, h text height)
Top Overlay:
  circle w0.127: c-13.506,1.317 r0.378
  lines w0.127: -13.474,1.459 ccw(c-13.506,1.317) -13.375,1.254
  lines w0.152: -19.125,-3.9 cw(c-19.125,-5.107) -18.215,-4.313
  text "3.7" at -3.775,5.025 h0.51 r270
  text "0" at -6.575,4.6 h0.51 r280
  text "2019" at -12.925,1.322 h0.51 r26
  text "TCK" at -17.55,-1.725 h0.51 r294.65
  text "TMS" at -18.275,-2.775 h0.51 r322.58
  text "TDO" at -18.775,-3.45 h0.51 r322.11
  text "TDI" at -17.875,-4.925 h0.51 r26
  text "3.7" at -19.325,-5.677 h0.51 r296
  text "UCSD/OSP Mac Variant" at -10.831,-6.345 h0.51 r26
  text "0" at -18.631,-7.196 h0.51 r296
Bottom Overlay:
  text "McMaster University Wireless Systems / Research Group" at 7,2.225 h0.3
  text "DGTL BTE-" at -1.475,-0.475 h0.51 r26
  text "RIC V2" at -11.125,-5.175 h0.51 r26
  text "0 D+ D− 3.7" at -18,-8.2 h0.51 r296
Mechanical 1:
  lines w0.051: -4.687,5.322 -8.731,4.489 -12.054,3.147 -15.419,0.922 -8.199,-3.846 -2.469,-1.051 -1.161,0.088 -0.2,0 -0.189,2.203 -1.095,2.234 -1.066,5.196
Mechanical 3:
  lines w0.076: -19.898,-9.005 -21.5,-5.7 -21.5,-5 -21.075,-4.525 ccw(c-21.153,-3.875) -20.503,-3.797 -17.4,0.1 -15.444,1.633 -10.016,4.208 -5.447,5.4 7.5,5.4 7.5,-0.339 6.564,-1.275 0.75,-1.275 -15.808,-9.225 -16.284,-9.225 -17.238,-9.225 -17.765,-9.225 ; -19.885,-9.009 -19.298,-9.39 ; -19.273,-9.396 -18.677,-9.304 cw(c-18.174,-9.723) -17.755,-9.221 ; -1.5,4.5 -1.5,4.5
Mechanical 15:
  lines w0.08: -1.5,5.04 0.975,5.04 0.975,2.262 0.45,2.25
  lines w0.09: -5.736,0.216 -4.572,0.765 ; -5.525,-0.533 -4.055,0.151
  lines w0.1: -4.1,1.129 -4.1,0.85 -3.325,0.85 ; -3.177,1.633 -2.513,1.628
  text "MK1" at 1.86,4.7 h0.31
  text "C25" at -4.563,1.534 h0.2 r24
  text "+" at -3.15,1.049 h0.5
  text "C35" at -3.015,0.444 h0.31
  text "+" at -4.674,0.04 h0.5 r23